# Altium PCB PCB1.PcbDoc
Units mil, origin at the board's own origin, x right, y up, seen from the top; angles counter-clockwise.
Board outline 3386.98 x 2206.38 mil, 2 copper layers (Top Layer, Bottom Layer), stack 65.792 mil thick; 42 components, 37 nets, 185 pads, 375 vias.
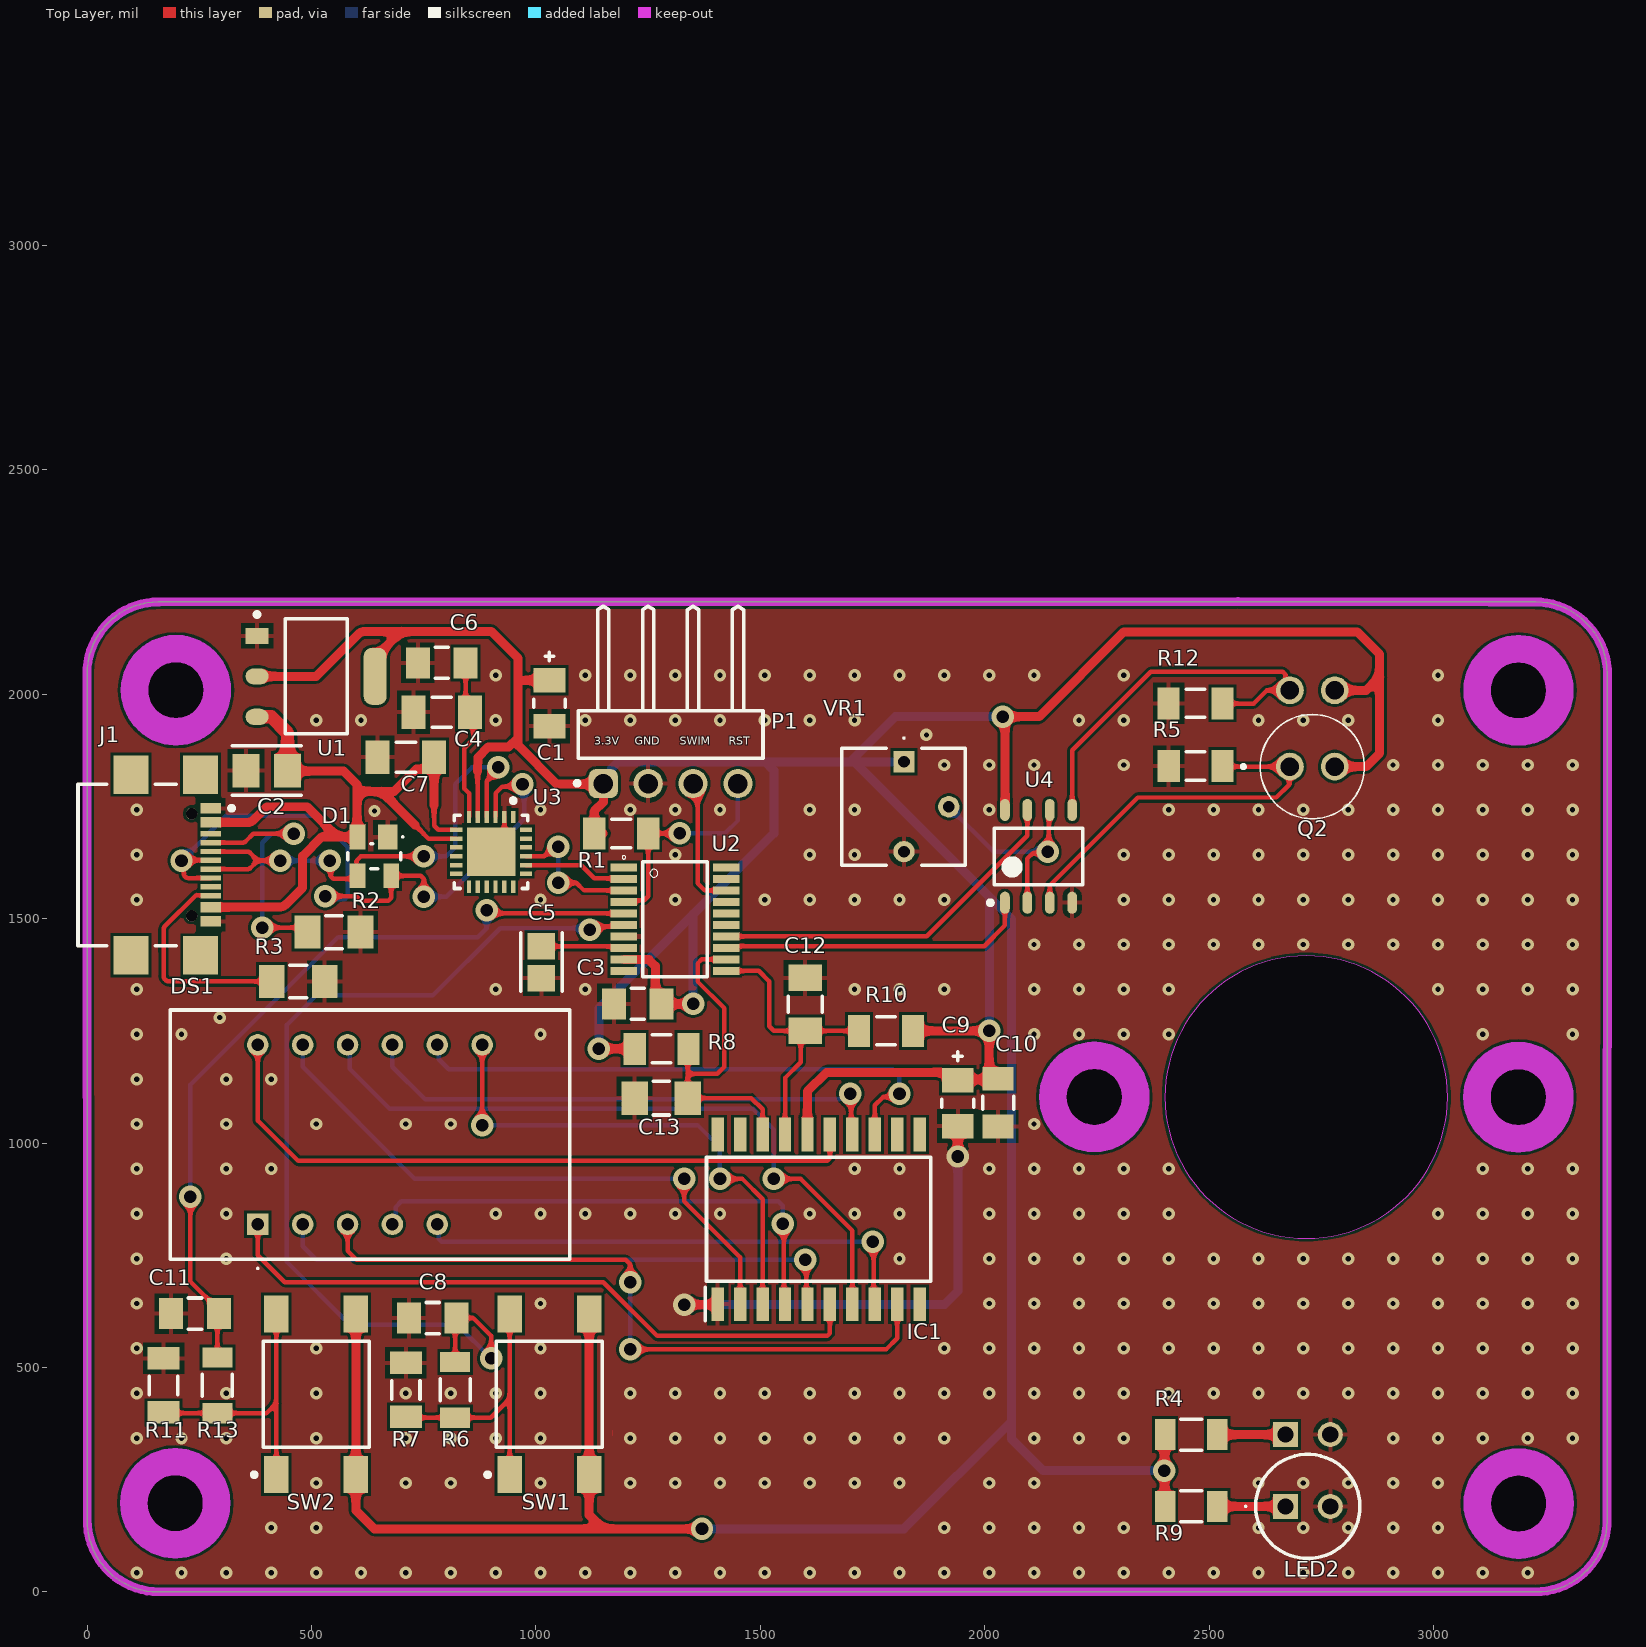
[diagram p0: Top Layer view]
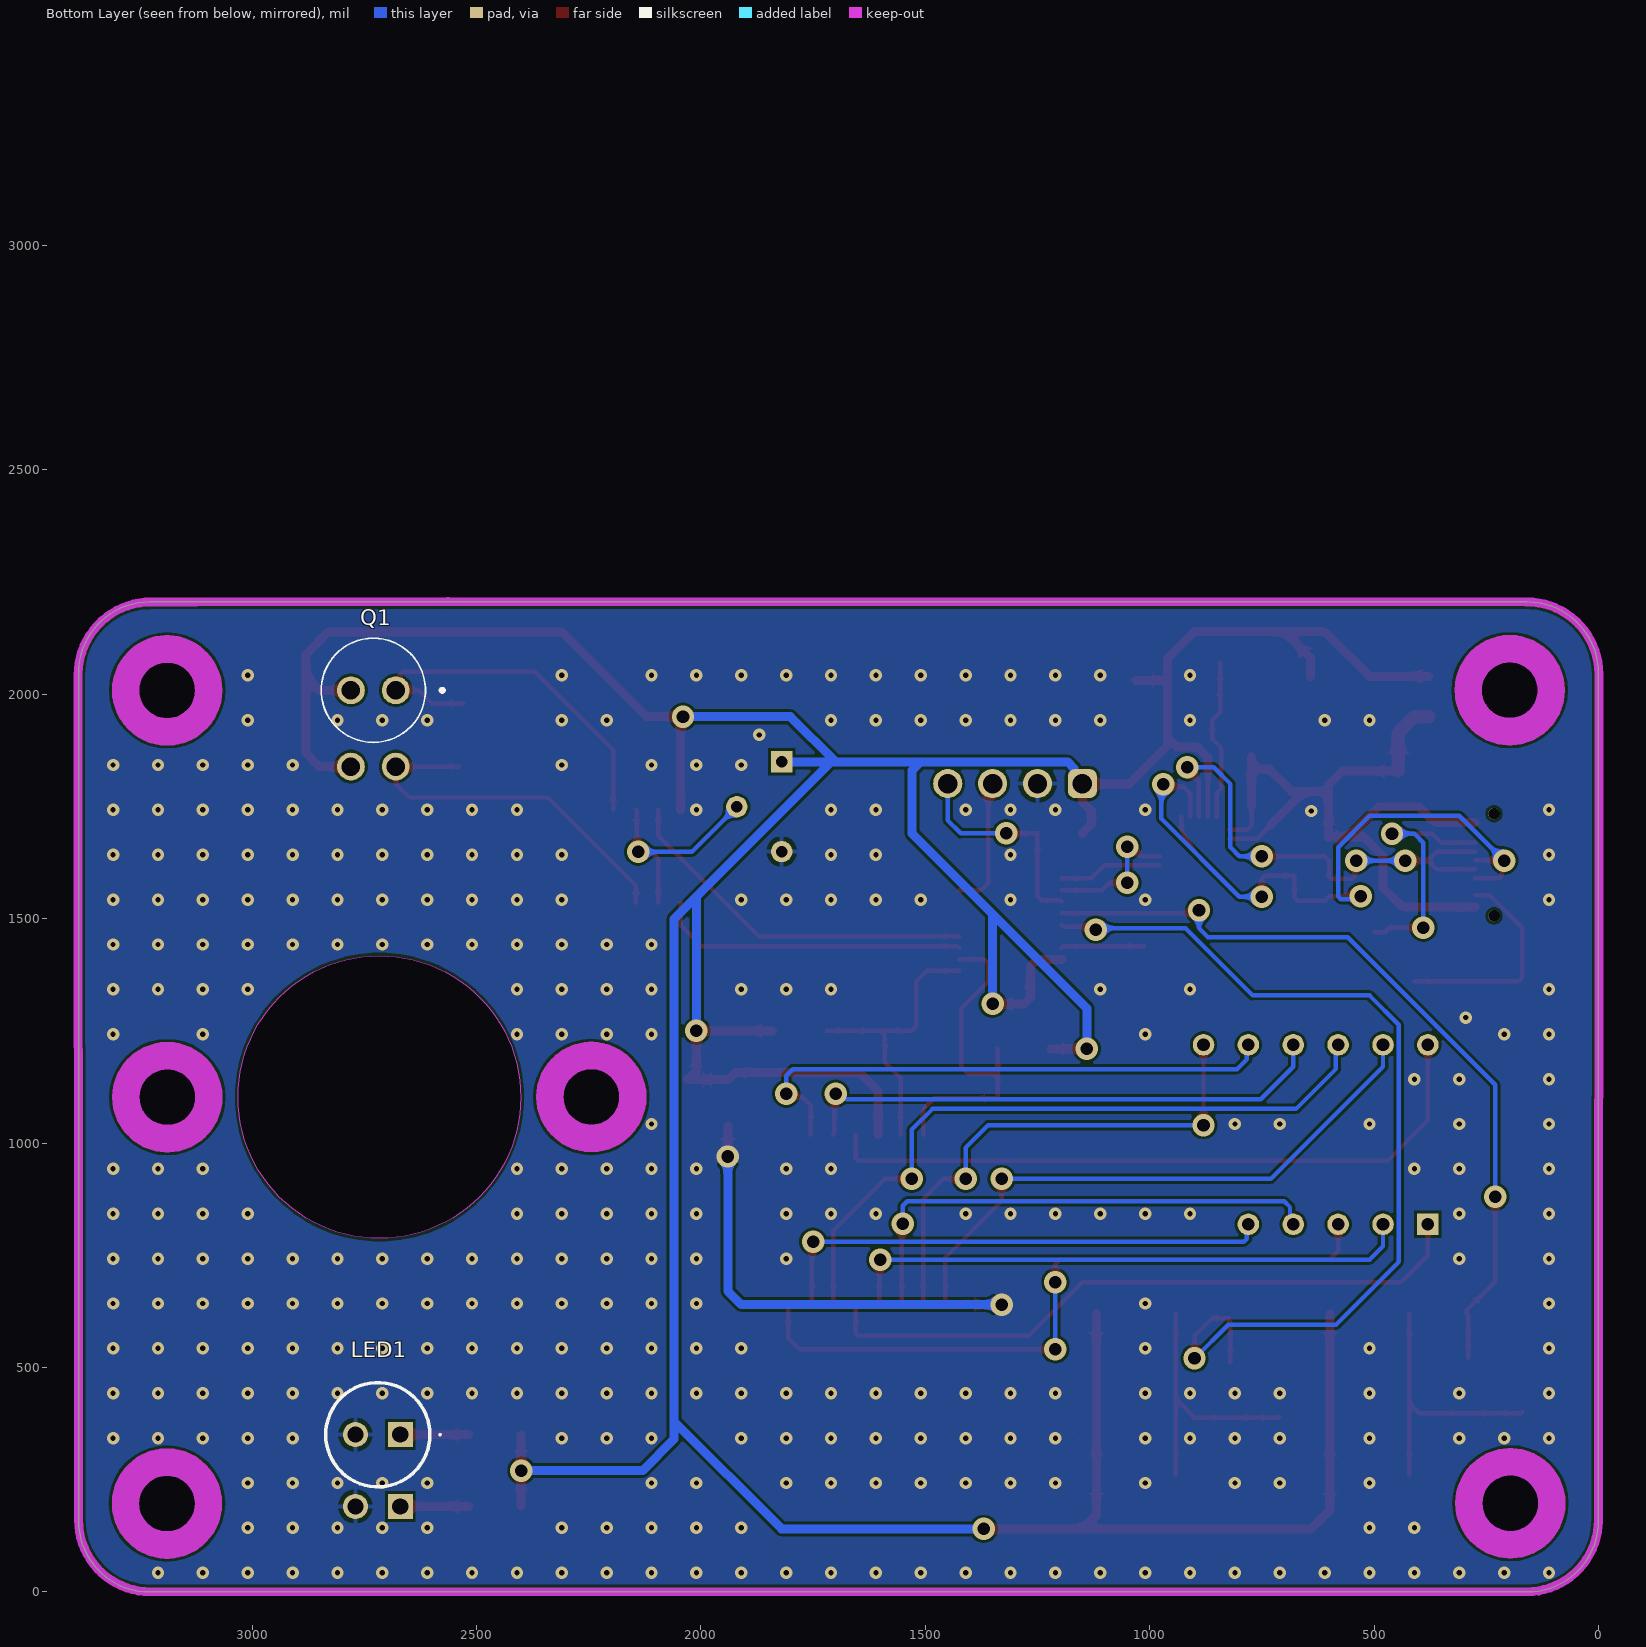
[diagram p1: Bottom Layer view, seen from below]
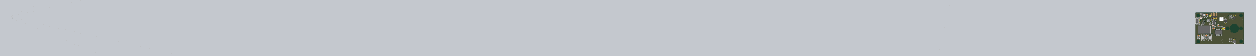
[diagram p2: 3D render of the assembled board from above, using the file's embedded part models]

## Layer stack, top to bottom
Top Solder: solder mask 0.4, Solder Resist, Dk 3.5
Top Layer: signal copper 1.4
Dielectric 1: dielectric 62.9921, FR-4, Dk 4.8
Bottom Layer: signal copper 1.4
Bottom Solder: solder mask 0.4, Solder Resist, Dk 3.5

## Board outline
3228.35,2205.87 158.63,2205.87 ccw(c158.63,2047.24) 0,2047.24 0,157.48 ccw(c157.98,157.48) 157.98,-0.5 3228.35,-0.5 ccw(c3228.67,157.8) 3386.97,157.48 3386.98,2047.24 ccw(c3228.35,2047.25)
cut-out: 2181.1,1102.69 ccw(c2244.09,1102.69) 2244.09,1039.7 ccw(c2244.09,1102.69) 2307.08,1102.69 ccw(c2244.09,1102.69) 2244.09,1165.68 ccw(c2244.09,1102.69)
cut-out: 3126.02,1102.14 ccw(c3189.01,1102.14) 3189.01,1039.15 ccw(c3189.01,1102.14) 3252,1102.14 ccw(c3189.01,1102.14) 3189.01,1165.13 ccw(c3189.01,1102.14)
cut-out: 2401.57,1102.36 ccw(c2716.54,1102.36) 2716.54,787.4 ccw(c2716.54,1102.36) 3031.5,1102.36 ccw(c2716.54,1102.36) 2716.54,1417.32 ccw(c2716.54,1102.36)
cut-out: 3126.8,196.56 ccw(c3189.79,196.56) 3189.79,133.57 ccw(c3189.79,196.56) 3252.78,196.56 ccw(c3189.79,196.56) 3189.79,259.55 ccw(c3189.79,196.56)
cut-out: 134.51,2009.13 ccw(c197.5,2009.13) 197.5,1946.14 ccw(c197.5,2009.13) 260.49,2009.13 ccw(c197.5,2009.13) 197.5,2072.12 ccw(c197.5,2009.13)
cut-out: 133.07,197.25 ccw(c196.06,197.25) 196.06,134.26 ccw(c196.06,197.25) 259.05,197.25 ccw(c196.06,197.25) 196.06,260.25 ccw(c196.06,197.25)
cut-out: 3126.4,2008.62 ccw(c3189.4,2008.62) 3189.4,1945.63 ccw(c3189.4,2008.62) 3252.39,2008.62 ccw(c3189.4,2008.62) 3189.4,2071.61 ccw(c3189.4,2008.62)

## Design rules (kind name [scope] priority, off if disabled: settings)
Clearance "Stitching GND" [IsStitchingVia and InNet('GND') vs (IsVia and (Not IsStitchingVia)) Or IsPad] p1: gap=5 ignorepadtopadclearanceinfootprint=FALSE
Clearance [All] p2: gap=6 ignorepadtopadclearanceinfootprint=FALSE except(10: Arc-Text Track-Text SMDPad-Text THPad-Text Via-Text Fill-Text Poly-Text Region-Text Text-Text)
MinimumSolderMaskSliver [All] p1: minsoldermaskwidth=6
PolygonConnect PolygonConnect_1 [InNet('GND')] p1: thpad.connectstyle=Relief thpad.reliefconductorwidth=10 thpad.reliefentries=4 thpad.polygonreliefangle="90 Angle" thpad.airgapwidth=10 smdpad.connectstyle=Relief smdpad.reliefconductorwidth=10 smdpad.reliefentries=4 smdpad.polygonreliefangle="90 Angle" smdpad.airgapwidth=10 via.connectstyle=Direct via.reliefconductorwidth=10 via.reliefentries=4 via.polygonreliefangle="90 Angle" via.airgapwidth=10
PolygonConnect [All] p2: connectstyle=Relief reliefconductorwidth=10 reliefentries=4 polygonreliefangle="90 Angle" airgapwidth=10
RoutingVias [All] p1: holewidth=28 width=50 viastyle="Through Hole" minholewidth=28 minwidth=50 maxholewidth=28 maxwidth=50
SilkToSolderMaskClearance [IsPad] p1: minsilkscreentomaskgap=4 clearancetoexposedcopper=TRUE
SolderMaskExpansion [All] p1: expansion=4 istentingtop=FALSE
SupplyNets "Schematic Supply Nets_2" [InNet('+5V')] p1: voltage=0.000
SupplyNets "Schematic Supply Nets_1" [InNet('+3.3V')] p2: voltage=0.000
SupplyNets "Schematic Supply Nets" [InNet('GND')] p3: voltage=0.000
Width Width_2 [InNet('+3.3V')] p1: maxlimit=30 minlimit=10 preferedwidth=20 minimp=50.000000 maximp=50.000000 favimp=50.000000
Width Width_1 [InNet('+5V')] p2: maxlimit=30 minlimit=10 preferedwidth=20 minimp=50.000000 maximp=50.000000 favimp=50.000000
Width [All] p3: maxlimit=39.37 minlimit=6 preferedwidth=10 minimp=50.000000 maximp=50.000000 favimp=50.000000
28 further rules are at their usual default settings.

## Components (designator, comment, footprint, x,y, rotation, side; value= is the part's Value field where it differs from the comment)
C1 "TAJA226M010RNJ" FP-TAJA-MFG 1030,1980 r90 top value=22µF
C2 "GCJ31CD7YA106KE02L" FP-GCJ31C-0_4-IPC_C 400,1830 r180 top value=10µF
C3 "UMK316B7104KLHT" FP-1206-L_3_2_0_15-W_1_6-IPC_B 1226.8,1310 r180 top value=100nF
C4 "1206ZC105JAT2A" CAPC1206(3216)130_M 790,1960 r180 top value=1µF
C5 "CC0805KKX7R6BB684" FP-CC0805-0_85-IPC_A 1012,1403 r270 top value=680nF
C6 "UMK316B7104KLHT" FP-1206-L_3_2_0_15-W_1_6-IPC_B 790,2070 r0 top value=100nF
C7 "1206ZC105JAT2A" CAPC1206(3216)130_M 710,1860 r0 top value=1µF
C8 "UMK316B7104KLHT" FP-1206-L_3_2_0_15-W_1_6-IPC_B 770,610 r180 top value=100nF
C9 "TLJA107M006R0500" FP-TLJA-MFG 1940,1088.82 r90 top value=100µF
C10 "UMK316B7104KLHT" FP-1206-L_3_2_0_15-W_1_6-IPC_B 2030,1090 r270 top value=100nF
C11 "UMK316B7104KLHT" FP-1206-L_3_2_0_15-W_1_6-IPC_B 240,620 r180 top value=100nF
C12 "12063A101KAT2A" FP-1206-L_3_2_0_2-W_1_6_0-IPC_A 1600,1309.09 r90 top value=100pF
C13 "12063A101KAT2A" FP-1206-L_3_2_0_2-W_1_6_0-IPC_A 1279.09,1100 r180 top value=100pF
D1 "SP0503BAHTG" LFUS-SOT143-4_V 640,1638.87 r270 top
DS1 "7 Segment Indicator" ELT315USOWAS530A3 380,818.87 r0 top
IC1 "TM1637" SOIC127P1045X280-20N 1630,830 r90 top
J1 "USB4110-GF-A" FP-USB4110-GF-A-MFG 130,1620 r270 top
LED1 "IR333" IR333H0A 2670,350.13 r0 bottom
LED2 "IR333" IR333H0A 2670,190.13 r0 top
P1 "ST-Link V2" 61300411021 1300,1910 r180 top
Q1 "PT333-3C" PT3333C 2730,2008.87 r0 bottom
Q2 "PT333-3C" PT3333C 2730,1838.87 r0 top
R1 "AC1206FR-1310KL" FP-AC1206-IPC_A 1190,1690 r0 top value=10k
R2 "ESR18EZPF5101" FP-ESR18-IPC_A 550,1470 r0 top value=5.1k
R3 "ESR18EZPF5101" FP-ESR18-IPC_A 470,1360 r0 top value=5.1k
R4 "RC3216J101CS" FP-RC3216-IPC_B 2460,350.13 r0 top value=100
R5 "AC1206FR-1310KL" FP-AC1206-IPC_A 2469.88,1980 r0 top value=10k
R6 "RP73D2B1K0BTG" FP-RP732B-MFG 820,450 r90 top value=1k
R7 "AC1206FR-1310KL" FP-AC1206-IPC_A 710,450 r90 top value=10k
R8 "AC1206FR-1310KL" FP-AC1206-IPC_A 1280,1210 r0 top value=10k
R9 "RC3216J101CS" FP-RC3216-IPC_B 2460,190.13 r0 top value=100
R10 "AC1206FR-1310KL" FP-AC1206-IPC_A 1780,1250 r0 top value=10k
R11 "RP73D2B1K0BTG" FP-RP732B-MFG 290,460 r90 top value=1k
R12 "AC1206FR-1310KL" FP-AC1206-IPC_A 2470,1840 r0 top value=10k
R13 "AC1206FR-1310KL" FP-AC1206-IPC_A 170,460 r90 top value=10k
SW1 "FSM4JSMATR" TECO-FSM4JSMATR_V 1030,440 r180 top
SW2 "FSM4JSMATR" TECO-FSM4JSMATR_V 510,440 r180 top
U1 "AMS1117-3.3" FP-AMS1117-IPC_B 510,2040 r0 top
U2 "STM8S103F3P6" SOP65P640X120-20N 1310,1498.87 r0 top
U3 "CP2104-F03-GM" FP-CP2104-F03-GM-MFG 900,1648.87 r270 top
U4 "LM393DT" STM-SO-8_D_L 2120,1638.87 r90 top
VR1 "3362P-1-205LF" 3362P1205LF 1820,1849.37 r270 top

## Footprints (in the part's own frame and the unit in brackets; to place one, negate y for a bottom-side part, rotate by r counter-clockwise, add the part's x,y. Pads: shape width x height; smd on the part's side, far side on the other; paste and mask are expansions set on the pad)
3362P1205LF [mm]
  rect 1.21x1.21 hole 0.66: 1(0,0)
  round 1.21 hole 0.66: 2(2.54,2.54) 3(5.08,0)
  silkscreen extent -1.4,-3.53 5.84,3.46, body extent -0.75,-3.54 5.85,3.45, height 4.65
61300411021 [mm] "Pin Header, pitch 2.54 mm, THT, Angled, single row, 4p"
  rrect50% 1.65x1.65 hole 1.1: 1(3.81,2.77)
  round 1.65 hole 1.1: 2(1.27,2.77) 3(-1.27,2.77) 4(-3.81,2.77)
  silkscreen extent -5.23,-7.27 5.41,2.87, body extent -5.08,-7.27 5.08,3.09, height 2.58
CAPC1206(3216)130_M [mm] "Chip Capacitor, Body 3.2x1.6mm, Height 1.3mm, IPC Low Density"
  rect 1.35x1.9 smd: 1(-1.6,0) 2(1.6,0)
  silkscreen extent -0.55,-0.85 0.55,0.85, body extent -1.7,-0.9 1.7,0.9, height 1.3
ELT315USOWAS530A3 [mm]
  rect 1.217x1.217 hole 0.71: 1(0,0)
  round 1.217 hole 0.71: 2(2.54,0) 3(5.08,0) 4(7.62,0) 5(10.16,0) 7(12.7,10.16) 8(10.16,10.16) 9(7.62,10.16) 10(5.08,10.16) 11(2.54,10.16) 12(0,10.16)
  silkscreen extent -4.95,-2.55 17.65,12.13, body extent -4.95,-1.97 17.65,12.13, height 7.55
FP-1206-L_3_2_0_2-W_1_6_0-IPC_A [mil]
  rect 59.24x75.05 smd paste+0 mask+0: 1(-59.09,0) 2(59.09,0)
  silkscreen extent -18,-38 18,38, body extent -63,-31 63,31, height 37
FP-1206-L_3_2_0_15-W_1_6-IPC_B [mil]
  rect 53.37x69.22 smd paste+0 mask+0: 1(-53.2,0) 2(53.2,0)
  silkscreen extent -15,-35 15,35, body extent -63,-31 63,31, height 71
FP-AC1206-IPC_A [mil]
  rect 49.53x71.34 smd paste+0 mask+0: 1(-60.12,0) 2(60.12,0)
  silkscreen extent -21,-31 21,31, body extent -61,-31 61,31, height 26
FP-AMS1117-IPC_B [mm]
  rect 1.304x0.912 smd paste+0 mask+0: 1(-3.345,2.29)
  rrect100% 1.304x0.912 smd paste+0 mask+0: 2(-3.345,0) 3(-3.345,-2.29)
  rrect70% 1.304x3.222 smd paste+0 mask+0: 4(3.345,0)
  silkscreen extent -3.47,-3.25 1.75,3.62, body extent -4.25,-3.5 4.25,3.5, height 0.25
FP-CC0805-0_85-IPC_A [mil]
  rect 59.24x61.27 smd paste+0 mask+0: 1(-35.46,0) 2(35.46,0)
  silkscreen extent -65,-46 65,46, body extent -85,-50 85,50, height 10
FP-CP2104-F03-GM-MFG [mm]
  rect 0.7x0.25 smd paste+0 mask+0: 1(-1.975,1.25) 2(-1.975,0.75) 3(-1.975,0.25) 4(-1.975,-0.25) 5(-1.975,-0.75) 6(-1.975,-1.25) 13(1.975,-1.25) 14(1.975,-0.75) 15(1.975,-0.25) 16(1.975,0.25) 17(1.975,0.75) 18(1.975,1.25)
  rect 0.25x0.7 smd paste+0 mask+0: 7(-1.25,-1.975) 8(-0.75,-1.975) 9(-0.25,-1.975) 10(0.25,-1.975) 11(0.75,-1.975) 12(1.25,-1.975) 19(1.25,1.975) 20(0.75,1.975) 21(0.25,1.975) 22(-0.25,1.975) 23(-0.75,1.975) 24(-1.25,1.975)
  rect 2.75x2.75 smd paste-1000 mask+0: 25(0,0)
  silkscreen extent -3.02,-2.07 2.08,2.07, body extent -2.42,-2.42 2.43,2.42, height 0.25
FP-ESR18-IPC_A [mil]
  rect 57.31x73.16 smd paste+0 mask+0: 1(-59.1,0) 2(59.1,0)
  silkscreen extent -19,-37 19,37, body extent -63,-31 63,31, height 26
FP-GCJ31C-0_4-IPC_C [mil]
  rect 61.12x74.93 smd paste+0 mask+0: 1(-46.27,0) 2(46.27,0)
  silkscreen extent -77,-55 77,55, body extent -63,-31 63,31, height 79
FP-RC3216-IPC_B [mil]
  rect 45.47x69.22 smd paste+0 mask+0: 1(-58.1,0) 2(58.1,0)
  silkscreen extent -24,-35 24,35, body extent -91,-44 91,44, height 10
FP-RP732B-MFG [mm]
  rect 1.15x1.7 smd paste+0 mask+0: 1(-1.575,0) 2(1.575,0)
  silkscreen extent -0.63,-0.85 0.63,0.85, body extent -1.53,-0.77 1.53,0.77, height 0.65
FP-TAJA-MFG [mm]
  rect 1.4x1.8 smd paste+0 mask+0: 1(-1.3,0) 2(1.3,0)
  silkscreen extent -0.23,-0.9 2.9,0.9, body extent -2.1,-1 2.1,1, height 0.25
FP-TLJA-MFG [mm]
  rect 1.4x1.8 smd paste+0 mask+0: 1(-1.3,0) 2(1.3,0)
  silkscreen extent -0.23,-0.9 2.9,0.9, body extent -2.1,-1 2.1,1, height 0.25
FP-USB4110-GF-A-MFG [mm]
  rect 2.18x2 smd paste+0 mask+0: 1(-5.11,3.105) 2(5.11,3.105) 3(-5.11,-0.825) 4(5.11,-0.825)
  rect 0.6x1.15 smd paste+0 mask+0: A1-B12(-3.2,3.68) A4-B9(-2.4,3.68) B1-A12(3.2,3.68) B4-A9(2.4,3.68)
  rect 0.3x1.15 smd paste+0 mask+0: A5(-1.25,3.68) A6(-0.25,3.68) A7(0.25,3.68) A8(1.25,3.68) B5(1.75,3.68) B6(0.75,3.68) B7(-0.75,3.68) B8(-1.75,3.68)
  round 0.65 hole 0.65 unplated paste-2539.97 mask+0: ""(-2.89,2.605) ""(2.89,2.605)
  silkscreen extent -4.57,-3.83 4.57,4.99, body extent -6.3,-3.92 6.3,4.36, height 0.25
IR333H0A [mm]
  rect 1.416x1.416 hole 0.91: 1(0,0)
  round 1.416 hole 0.91: 2(2.54,0)
  silkscreen extent -2.3,-2.95 4.22,2.95, body extent -1.68,-2.95 4.22,2.95, height 10.5
LFUS-SOT143-4_V [mm] "SOT143, 4-Leads, Body 3.04x1.4mm, Pitch 1.90mm"
  rect 1.4x1.1 smd: 1(-1.1,0.75)
  rect 1.4x0.9 smd: 2(-1.1,-0.95) 3(1.1,-0.95) 4(1.1,0.95)
  silkscreen extent -1.15,-1.5 0.7,1.65, body extent -0.7,-1.52 0.7,1.52, height 1.22
PT3333C [mm]
  round 1.575 hole 1.05: 1(-1.27,0) 2(1.27,0)
  silkscreen extent -4,-2.95 2.95,2.95, body extent -2.41,-3.08 3.04,2.82, height 15.22
SOIC127P1045X280-20N [mm]
  rect 1.9x0.7 smd: 1(-4.8,5.715) 2(-4.8,4.445) 3(-4.8,3.175) 4(-4.8,1.905) 5(-4.8,0.635) 6(-4.8,-0.635) 7(-4.8,-1.905) 8(-4.8,-3.175) 9(-4.8,-4.445) 10(-4.8,-5.715) 11(4.8,-5.715) 12(4.8,-4.445) 13(4.8,-3.175) 14(4.8,-1.905) 15(4.8,-0.635) 16(4.8,0.635) 17(4.8,1.905) 18(4.8,3.175) 19(4.8,4.445) 20(4.8,5.715)
  silkscreen extent -5.75,-6.35 3.5,6.42, body extent -5.23,-6.35 5.23,6.35, height 2.8
SOP65P640X120-20N [mm]
  rect 1.5x0.45 smd: 1(-2.9,2.925) 2(-2.9,2.275) 3(-2.9,1.625) 4(-2.9,0.975) 5(-2.9,0.325) 6(-2.9,-0.325) 7(-2.9,-0.975) 8(-2.9,-1.625) 9(-2.9,-2.275) 10(-2.9,-2.925) 11(2.9,-2.925) 12(2.9,-2.275) 13(2.9,-1.625) 14(2.9,-0.975) 15(2.9,-0.325) 16(2.9,0.325) 17(2.9,0.975) 18(2.9,1.625) 19(2.9,2.275) 20(2.9,2.925)
  silkscreen extent -3,-3.25 1.83,3.6, body extent -3.2,-3.25 3.2,3.25, height 1.19
STM-SO-8_D_L [mm] "SOIC, 8-Leads, Body 5x4mm, Pitch 1.27mm, IPC High Density"
  oval 1.25x0.55 smd: 1(-2.625,1.905) 2(-2.625,0.635) 3(-2.625,-0.635) 4(-2.625,-1.905) 5(2.625,-1.905) 6(2.625,-0.635) 7(2.625,0.635) 8(2.625,1.905)
  silkscreen extent -2.75,-2.5 1.6,2.85, body extent -3,-2.5 3,2.5, height 1.75
TECO-FSM4JSMATR_V [mm] "SMD, 4-Leads, Body 6x6mm, Pitch 4.5mm"
  rect 1.4x2.1 smd: 1(2.25,4.55) 2(2.25,-4.55) 3(-2.25,4.55) 4(-2.25,-4.55)
  silkscreen extent -3,-3 3.62,4.67, body extent -3,-5 3,5, height 5.08

## Part data
C1: library part CMP-001-00089-1, "Cap Tant Solid 22uF 10V A CASE 20%( 3.2 X 1.6 X 1.6mm) Inward L SMD 3216-18 3 Ohm 125C T/R", Max Operating Temperature=125°C, Min Operating Temperature=-55°C, Package=1206, Ripple Current=63mA, Tolerance=20%, Voltage=10V, Mounting Technology="Surface Mount", Pins=2
C2: library part CMP-001-00085-1, "Ceramic Capacitor, Ceramic, 35V, 10% +Tol, 10% -Tol, X7T, 22/-33% TC, 10uF, Surface Mount, 1206", Max Operating Temperature=125°C, Min Operating Temperature=-55°C, Package=1206, Tolerance=10%, Voltage=35V, Mounting Technology="Surface Mount"
C3 C6 C8 C10 C11: library part CMP-001-00093-1, "Ceramic Capacitor, Multilayer, Ceramic, 50V, 10% +Tol, 10% -Tol, X7R, 15% TC, 0.1uF, Surface Mount, 1206", Capacitor Type=Ceramic, Max Operating Temperature=125°C, Min Operating Temperature=-55°C, Package=1206, Mounting Technology="Surface Mount", Pins=2, RoHS Compliant=Yes
C4 C7: library part CMP-001-00084-1, "Ceramic Capacitor, Multilayer, Ceramic, 10V, 5% +Tol, 5% -Tol, X7R, 15% TC, 1uF, Surface Mount, 1206", Max Operating Temperature=125°C, Min Operating Temperature=-55°C, Package=1206, Tolerance=5%, Voltage=10V, Mounting Technology="Surface Mount", Pins=2
C5: library part CMP-001-00094-1, "Ceramic Capacitor, Multilayer, Ceramic, 10V, 10% +Tol, 10% -Tol, X7R, 15% TC, 0.68uF, Surface Mount, 0805", Capacitor Type=Ceramic, Max Operating Temperature=125°C, Min Operating Temperature=-55°C, Package=0805, Mounting Technology="Surface Mount", Pins=2, RoHS Compliant=Yes
C9: library part CMP-001-00091-1, "Cap Tant Solid 100uF 6.3V A CASE 20% (3.2 X 1.6 X 1.6mm) Inward L SMD 3216-18 0.5 Ohm 125C T/R", Max Operating Temperature=125°C, Min Operating Temperature=-55°C, Package=1206, Ripple Current=155mA, Tolerance=20%, Voltage=6.3V, Mounting Technology="Surface Mount", Pins=2
C12 C13: library part CMP-001-00096-1, "Ceramic Capacitor, Multilayer, Ceramic, 25V, 10% +Tol, 10% -Tol, C0G, 30ppm/Cel TC, 0.0001uF, Surface Mount, 1206", Capacitor Type=Ceramic, Max Operating Temperature=125°C, Min Operating Temperature=-55°C, Package=1206, Mounting Technology="Surface Mount", Pins=2, RoHS Compliant=Yes
D1: library part CMP-004-00031-1, "SP050xBA Series 8.5 V 30 pF Triple Uni-Directional TVS Avalanche Diode-SOT143-4", Max Operating Temperature=125°C, Min Operating Temperature=-40°C, Package=SOT-143, Mounting Technology="Surface Mount", Pins=4
DS1: library part ELT-315USOWA_S530-A3, "Display", Manufacturer=Everlight, Part Number=ELT-315USOWA/S530-A3, Datasheet Link=https://media.digikey.com/pdf/Data%20Sheets/Everlight%20PDFs/ELT-315USOWA_S530-A3.pdf, Height=7.45mm
IC1: library part TM1637__SOP_, "Integrated Circuit", Manufacturer="TITAN MICRO ELECTRONICS", Part Number="TM1637 (SOP)", Datasheet Link=https://www.mcielectronics.cl/website_MCI/static/documents/Datasheet_TM1637.pdf, Height=2.8mm
J1: library part CMP-002-00071-1, "USB Connector, 16 Contact(s), Male, Right Angle, Surface Mount Terminal, Locking, Receptacle", Max Operating Temperature=85°C, Min Operating Temperature=-40°C, Voltage=20V, Gender=Receptacle, Pins=16
LED1 LED2: library part IR333_H0-A, "LED", Manufacturer=Everlight, Mouser Part Number=638-IR333/H0-A, Part Number=IR333/H0-A, Datasheet Link=https://datasheet.lcsc.com/lcsc/1808280419_Everlight-Elec-IR333-H0-A_C264292.pdf, Height=10.4mm, Mouser Price/Stock=https://www.mouser.co.uk/ProductDetail/Everlight/IR333-H0-A?qs=By6Nw2ByBD39%252BlkBkN%2FobQ%3D%3D
P1: library part CMP-007-000000-1, Color=Black, Contact Resistance=20m?, Current Rating=3A, Operating Supply Voltage=250V, Component Type=Standard, Connector Type="Male Pin", Contact Material=Copper, Contact Mating Length=5.9944mm, Contact Plating=Gold, Design Item ID=CMP-1502-01063-3, Gender=Male, Lead Pitch=2.54mm, Mount="Through Hole", NexarPartId=31153320, Number of Contacts=4, Number of Pins=4, Number of Positions=4, Number of Rows=1, Pin Count=4, Pitch=2.54mm, REACH SVHC=Unknown, RoHS=Compliant, Source="Components - 25.08.25 - 11.48.SchLib", Termination=Solder
Q1 Q2: "Phototransistor", Manufacturer=Everlight, Mouser Part Number=638-PT3333C, Arrow Part Number=PT333-3C, Arrow Price/Stock=https://www.arrow.com/en/products/pt333-3c/everlight-electronics?region=nac, Datasheet Link=https://datasheet.datasheetarchive.com/originals/distributors/Datasheets-3/DSA-51362.pdf, Mouser Price/Stock=https://www.mouser.com/Search/Refine.aspx?Keyword=638-PT3333C, Part Number=PT333-3C
R1 R5 R7 R8 R10 R12 R13: library part CMP-009-00188-1, "Res Thick Film 1206 10K Ohm 1% 0.25W(1/4W) ±100ppm/°C Pad SMD T/R Automotive AEC-Q200", Max Operating Temperature=155°C, Min Operating Temperature=-55°C, Package=1206, Tolerance=1%, Voltage=200V, Mounting Technology="Surface Mount"
R2 R3: library part CMP-009-00187-1, "Res Thick Film 1206 5.1K Ohm 1% 0.5W(1/2W) ±100ppm/C Pad SMD T/R Automotive AEC-Q200", Max Operating Temperature=155°C, Min Operating Temperature=-55°C, Package=1206, Tolerance=1%, Voltage=200V, Mounting Technology="Surface Mount"
R4 R9: library part CMP-009-00193-1, "Res Thick Film 1206 100 Ohm 5% 1/4W ±100ppm/°C Molded SMD T/R", Max Operating Temperature=155°C, Min Operating Temperature=-55°C, Package=1206, Tolerance=5%, Voltage=200V, Mounting Technology="Surface Mount"
R6 R11: library part CMP-009-00192-1, "Res Thin Film 1206 1K Ohm 0.1% 0.25W(1/4W) ±15ppm/C Pad SMD Cut Tape Medical", Max Operating Temperature=155°C, Min Operating Temperature=-55°C, Package=1206, Tolerance=0.1%, Voltage=25V, Mounting Technology="Surface Mount", Pins=2
SW1 SW2: library part CMP-016-00017-1, "Keypad Switch, 1 Switches, SPST, Momentary-tactile, 0.05A, 24VDC, 2.06N, Solder Terminal, Surface Mount-straight", Max Operating Temperature=85°C, Min Operating Temperature=-20°C, Mounting Technology="Surface Mount", RoHS Compliant=Yes
U1: library part CMP-019-00049-1, "Fixed Positive LDO Regulator, 3.3V, 1.3V Dropout, PDSO3", Package=SOP, Pins=3, RoHS Compliant=Yes
U2: library part CMP-031-00007-3, "STM8 series Microcontroller IC 8-Bit 16MHz 8KB (8K x 8) FLASH 20-TSSOP", Package="TSSOP-20 STMicroelectronics", Check_prices=https://www.snapeda.com/parts/STM8S103F3P6/STMicroelectronics/view-part/?ref=eda, Component Type=Standard, Design Item ID=STM8S103F3P6, MF=STMicroelectronics, MP=STM8S103F3P6, Pins=20, SnapEDA_Link=https://www.snapeda.com/parts/STM8S103F3P6/STMicroelectronics/view-part/?ref=snap, Source=STM8S103F3P6.SchLib
U3: library part CMP-015-00008-1, "USB-to-UART 1-CH 576byte FIFO 3.3V Automotive 24-Pin QFN EP Tube", Max Operating Temperature=85°C, Max Supply Voltage=3.6V, Min Operating Temperature=-40°C, Min Supply Voltage=3V, Package=QFN, Pins=24
U4: library part CMP-016-00016-1, "Comparator, 2 Func, 9000uV Offset-Max, 1300ns Response Time, BIPolar, PDSO8", Max Operating Temperature=70°C, Min Operating Temperature=0°C, Nominal Supply Voltage=5V, Package=SOP, Pins=8, RoHS Compliant=Yes
VR1: "Variable Resistor", Manufacturer=Bourns, Mouser Part Number=652-3362P-1-205LF, Arrow Part Number=3362P-1-205LF, Arrow Price/Stock=https://www.arrow.com/en/products/3362p-1-205lf/bourns?region=nac, Datasheet Link=https://www.bourns.com/docs/Product-Datasheets/3362.pdf, Height=5.13mm, Mouser Price/Stock=https://www.mouser.co.uk/ProductDetail/Bourns/3362P-1-205LF?qs=nRMFw3K2t64w844%2Fcd92TA%3D%3D, Part Number=3362P-1-205LF

## Via types
v1: diameter 27.56, hole 11.81, Top Layer to Bottom Layer, tented both sides, 338 vias
v2: diameter 50, hole 28, Top Layer to Bottom Layer, tented both sides, 37 vias

## Nets (pads, with @x,y where several pads share a name; then routed paths per layer and width w, separated by ;. In a path a pad name is that pad's centre, name@x,y a point inside that pad or via, vN(x,y) a via of type N, cw(c..) or ccw(c..) an arc to the next point about the centre after c; other vN are vias at no path point)
+3.3V: C1.2 C3.1 C9.2 C10.1 IC1.16 P1.1 Q1.2 Q2.2 R1.1 R4.1 R8.1 R9.1 R10.2 SW1.3 SW1.4 SW2.3 SW2.4 U1.2 U1.4 U2.9 U3.5 U4.8 VR1.1 | length 11457.9
  Top Layer w10: 870,1829.37 U3.5
  Top Layer w20: U1.2 510,2040 606,2136 606.28,2136 cw(c618.28,2120) 618.28,2140 700,2140 ; SW2.4 SW2.3 598.58,181.42 640,140 1150,140 ; U1.4 641.69,2081.69 700,2140 ; 870,1829.37 870.47,1858.9 894.15,1882.57 939.2,1882.57 960,1903.37 ; C1.2 961.18,2031.18 960,2030 ; SW1.4 SW1.3 1118.58,171.42 1150,140 ; v2(1140,1210) R8.1 ; R1.1@1149.88,1690 1130,1709.88 1130,1740 1149.94,1759.94 P1.1@1149.94,1800 ; P1.1@1150,1800 P1.1@1149.94,1800 ; P1.1 1149.94,1800.89 P1.1@1149.94,1800 ; U2.9@1196.56,1408.57 1251.43,1408.57 1265.94,1394.06 1265.94,1324.06 C3.1 v2(1350,1310) ; v2(1370,140) 1150,140 ; IC1.16 1605,1115 1647.56,1157.56 1922.44,1157.56 C9.2 1941.6,1141.6 2028.4,1141.6 C10.1 2026.68,1143.2 2010,1159.89 v2(2010,1250) R10.2 ; U4.8 2045.32,1742.53 2045.32,1944.68 v2(2040,1950) 2121.13,1950 2310,2138.87 2830,2138.87 2880,2088.87 2880,2038.87 ; R9.1@2400.95,191.08 v2@2400.95,269.17 ; v2@2400.95,271.08 R4.1@2400.95,349.17 ; Q2.2 2850,1838.87 2880,1868.87 2880,2038.87 ; Q1.2 2850,2008.87 2880,2038.87 ; 700,2140 900,2140 960,2080 960,2030 ; 960,1903.37 960,2030 ; 960,1903.37 960,1886.19 1046.19,1800 P1.1@1149.94,1800
  Bottom Layer w20: v2(1140,1210) 1140,1300 1350,1510 ; P1.1 1168.63,1819.57 1168.63,1835.12 1182.94,1849.43 1470.08,1849.43 1470.14,1849.37 1510.63,1849.37 ; v2(1350,1310) 1350,1510 ; v2(1370,140) 1820,140 2060,380 ; VR1.1 1700,1849.37 ; v2(2010,1250) 2010.12,1250.12 2010.12,1548.75 ; v2(2040,1950) 1800.63,1950 1700,1849.37 ; v2(2400,270.13) 2129.87,270.13 2060,340 2060,380 ; 1350,1510 1530,1690 1530,1830 1510.63,1849.37 ; 1510.63,1849.37 1700,1849.37 ; 1700,1849.37 1709.5,1849.37 2010.12,1548.75 ; 2010.12,1548.75 2060,1498.87 2060,380
+5V: C2.1 C7.2 D1.2 J1.A4-B9 J1.B4-A9 U1.3 U3.7 U3.8 | length 1822.3
  Top Layer w10: 730,1708.87 760.47,1678.39 U3.8 ; 772.99,1752.99 772.99,1707.01 781.92,1698.08 U3.7
  Top Layer w20: J1.B4-A9 427.86,1525.51 ccw(c427.86,1545.51) 439.86,1529.51 ccw(c427.86,1545.51) 442,1531.37 480,1569.37 480,1639.37 522.8,1682.17 557.2,1682.17 ; J1.A4-B9 356.83,1714.49 ccw(c356.83,1734.49) 368.83,1718.49 ccw(c356.83,1734.49) 370.98,1720.35 400,1749.37 490,1749.37 557.2,1682.17 ; C2.1 447.4,1828.87 571.13,1828.87 601.3,1798.7 601.3,1783.87 ; D1.2@601.3,1683.47 601.3,1783.87 ; D1.2 557.2,1682.17 ; 730,1708.87 655,1783.87 ; 772.99,1752.99 C7.2@772.99,1849.87 ; C7.2 C7.2@772.99,1849.87 ; 601.3,1783.87 655,1783.87 ; 655,1783.87 683.87,1783.87 733.29,1833.29 756.42,1833.29 C7.2@772.99,1849.87
  Top Layer w30: U1.3 410.16,1949.84 446.27,1913.73 C2.1
Button1: C11.1 R11.2 U2.5 | length 1787.9
  Top Layer w10: v2(230,880) 230,691.13 293.2,627.93 C11.1 290,616.8 R11.2 ; v2(890,1518.87) 897.2,1511.66 U2.5
  Bottom Layer w10: v2@230,880.87 230,1130 558.87,1458.87 870,1458.87 890,1478.87 v2(890,1518.87)
Button2: C8.1 R6.2 U2.6 | length 2159.8
  Top Layer w10: R6.2 C8.1@820,602.07 ; C8.1@823.2,602.07 C8.1 860,610 900,570 v2(900,520) ; v2(1120,1475.66) 1126.55,1482.21 1191.97,1482.21 U2.6
  Bottom Layer w10: v2(900,520) 824.64,595.36 584.64,595.36 445.04,734.96 445.04,1263.91 510,1328.87 770,1328.87 920,1478.87 1116.8,1478.87 v2(1120,1475.66)
CC1: J1.A5 R2.1 | length 574.8
  Top Layer w10: J1.A5 345.7,1669.21 ccw(c345.7,1679.21) 351.7,1671.21 ccw(c345.7,1679.21) 352.75,1672.12 370,1689.37 v2(460,1689.37) ; v2(390,1480) 466.34,1480 476.34,1470 R2.1 R2.1@500,1470
  Bottom Layer w10: v2(390,1480) 390,1669.37 410,1689.37 v2(460,1689.37)
CC2: J1.B5 R3.1 | length 489.9
  Top Layer w10: 170,1372.89 ccw(c182.8,1372.92) 180.33,1360.37 181.36,1360.17 ccw(c183.2,1370) 183.2,1360 R3.1 ; 170,1372.93 169.96,1475.85 cw(c179.96,1475.81) 171.96,1481.81 cw(c179.96,1475.81) 172.89,1482.89 242.65,1552.65 J1.B5@274.88,1552.65
CLK: C13.1 IC1.18 R8.2 U2.12 | length 755.3
  Top Layer w10: R8.2 1338.17,1208.05 1338.17,1154.03 ; U2.12 1369.3,1409.3 1360,1400 1360,1360 1420,1300 1420,1170 1404.03,1154.03 1338.17,1154.03 ; IC1.18 1505,1075 1480,1100 C13.1 1338.17,1154.03
D+: D1.4 J1.A6 J1.B6 U3.3 | length 1581.3
  Top Layer w10: J1.B6 225.08,1590.47 cw(c225.08,1600.47) 215.08,1600.47 215.08,1624.29 v2(210,1629.37) 211.12,1630.49 J1.A6@274.88,1630.49 ; v2(530,1550) 599.85,1550 609.85,1540 671.13,1540 677.4,1546.27 D1.4 743.31,1595.56 750,1588.87 v2(750,1548.87) ; U3.3 909.92,1726.7 909.92,1779.29 925,1794.37 965,1794.37 v2(970,1799.37)
  Bottom Layer w10: v2(210,1629.37) 310,1729.37 510,1729.37 580,1659.37 580,1549.37 574.14,1543.51 536.49,1543.51 v2(530,1550) ; v2(750,1548.87) 800,1548.87 973.79,1722.65 973.79,1795.58 v2(970,1799.37)
D-: D1.3 J1.A7 J1.B7 U3.4 | length 1106.9
  Top Layer w10: J1.A7 356.65,1610.16 ccw(c356.65,1620.16) 362.65,1612.16 ccw(c356.65,1620.16) 363.69,1613.06 380,1629.37 ; J1.B7 355.7,1649.53 cw(c355.7,1639.53) 362.77,1646.6 380,1629.37 ; v2(430,1629.37) 380,1629.37 ; v2(540,1628.87) 542.43,1626.44 542.43,1594.72 548.28,1588.87 595.91,1588.87 D1.3 600,1598.16 600,1628.87 610,1638.87 v2(750,1638.87) ; U3.4 890.16,1806.64 916,1832.49 v2(916,1837.37)
  Bottom Layer w10: v2@450.25,1629.12 539.75,1629.12 v2(540,1628.87) ; v2(750,1638.87) 800,1638.87 820,1658.87 820,1800 857.37,1837.37 v2(916,1837.37)
DIO: C12.1 IC1.17 R10.1 U2.11 | length 659.3
  Top Layer w10: U2.11 1496.29,1383.71 1520,1360 1520,1260 1530,1250 C12.1 ; IC1.17 1555,1145 1590,1180 1590,1240 C12.1 ; R10.1 C12.1
DIV: U4.2 U4.6 VR1.2 | length 506.4
  Top Layer w10: U4.2 2095,1633.87 2106.72,1645.58 2136.72,1645.58 2142.77,1651.64 2142.77,1739.98 U4.6
  Bottom Layer w10: VR1.2@1920,1748.87 2020,1648.87 v2(2140,1648.87)
DO_1: U2.13 U4.1 | length 692.1
  Top Layer w10: U2.13 1428.03,1438.75 1998.75,1438.75 2045,1485 U4.1
DO_2: U2.14 U4.7 | length 821
  Top Layer w10: U2.14 1870.48,1460.48 2095,1685 U4.7
GND: C1.1 C2.2 C3.2 C4.2 C5.2 C6.1 C7.1 C8.2 C9.1 C10.2 C11.2 C12.2 C13.2 D1.1 IC1.1 J1.A1-B12 J1.B1-A12 LED1.2 LED2.2 P1.2 R2.2 R3.2 R5.1 R7.2 R12.1 R13.2 U1.1 U2.7 U3.2 U3.25 U4.4 VR1.3 | length 1132
  Top Layer w10: U3.25 929.53,1698 U3.2
  Top Layer w20: v2(1330,640) 1403.98,640 IC1.1 ; v2(1940,970) 1940,1017.22 C9.1 ; C9.1@1940,1017.64 C9.1@1940.42,1017.22
  Bottom Layer w20: v2(1330,640) 1910,640 1940,670 v2@1940,950
  other v1: 110,42.37 210,42.37 310,42.37 410,42.37 510,42.37 610,42.37 710,42.37 810,42.37 910,42.37 1010,42.37 1110,42.37 1210,42.37 1310,42.37 1410,42.37 1510,42.37 1610,42.37 1710,42.37 1810,42.37 1910,42.37 2010,42.37 2110,42.37 2210,42.37 2310,42.37 2410,42.37 2510,42.37 2610,42.37 2710,42.37 2810,42.37 2910,42.37 3010,42.37 3110,42.37 3210,42.37 410,142.37 510,142.37 1910,142.37 2010,142.37 2110,142.37 2210,142.37 2310,142.37 2610,142.37 2710,142.37 2810,142.37 2910,142.37 3010,142.37 510,242.37 710,242.37 810,242.37 1010,242.37 1210,242.37 1310,242.37 1410,242.37 1510,242.37 1610,242.37 1710,242.37 1810,242.37 2010,242.37 2110,242.37 2610,242.37 2710,242.37 2810,242.37 2910,242.37 3010,242.37 110,342.37 210,342.37 310,342.37 510,342.37 710,342.37 810,342.37 910,342.37 1010,342.37 1210,342.37 1310,342.37 1410,342.37 1510,342.37 1610,342.37 1710,342.37 1810,342.37 1910,342.37 2110,342.37 2210,342.37 2310,342.37 2910,342.37 3010,342.37 3110,342.37 3210,342.37 3310,342.37 110,442.37 310,442.37 510,442.37 710,442.37 810,442.37 910,442.37 1010,442.37 1210,442.37 1310,442.37 1410,442.37 1510,442.37 1610,442.37 1710,442.37 1810,442.37 1910,442.37 2010,442.37 2110,442.37 2210,442.37 2310,442.37 2410,442.37 2510,442.37 2610,442.37 2710,442.37 2810,442.37 2910,442.37 3010,442.37 3110,442.37 3210,442.37 3310,442.37 110,542.37 510,542.37 1010,542.37 1910,542.37 2010,542.37 2110,542.37 2210,542.37 2310,542.37 2410,542.37 2510,542.37 2610,542.37 2710,542.37 2810,542.37 2910,542.37 3010,542.37 3110,542.37 3210,542.37 3310,542.37 110,642.37 1010,642.37 2010,642.37 2110,642.37 2210,642.37 2310,642.37 2410,642.37 2510,642.37 2610,642.37 2710,642.37 2810,642.37 2910,642.37 3010,642.37 3110,642.37 3210,642.37 3310,642.37 110,742.37 310,742.37 1810,742.37 2010,742.37 2110,742.37 2210,742.37 2310,742.37 2410,742.37 2510,742.37 2610,742.37 2710,742.37 2810,742.37 2910,742.37 3010,742.37 3110,742.37 3210,742.37 3310,742.37 110,842.37 310,842.37 910,842.37 1010,842.37 1110,842.37 1210,842.37 1310,842.37 1410,842.37 1610,842.37 1710,842.37 1810,842.37 2010,842.37 2110,842.37 2210,842.37 2310,842.37 2410,842.37 3010,842.37 3110,842.37 3210,842.37 3310,842.37 110,942.37 310,942.37 410,942.37 1710,942.37 1810,942.37 2010,942.37 2110,942.37 2210,942.37 2310,942.37 2410,942.37 3110,942.37 3210,942.37 3310,942.37 110,1042.37 310,1042.37 510,1042.37 710,1042.37 810,1042.37 2110,1042.37 110,1142.37 310,1142.37 410,1142.37 110,1242.37 210,1242.37 1010,1242.37 2110,1242.37 2210,1242.37 2310,1242.37 2410,1242.37 3110,1242.37 3310,1242.37 295.28,1279.53 110,1342.37 910,1342.37 1110,1342.37 1710,1342.37 1810,1342.37 1910,1342.37 2110,1342.37 2210,1342.37 2310,1342.37 2410,1342.37 3010,1342.37 3110,1342.37 3210,1342.37 3310,1342.37 2110,1442.37 2210,1442.37 2310,1442.37 2410,1442.37 2510,1442.37 2610,1442.37 2710,1442.37 2810,1442.37 2910,1442.37 3010,1442.37 3110,1442.37 3210,1442.37 3310,1442.37 110,1542.37 1010,1542.37 1310,1542.37 1510,1542.37 1610,1542.37 1710,1542.37 1810,1542.37 1910,1542.37 2310,1542.37 2410,1542.37 2510,1542.37 2610,1542.37 2710,1542.37 2810,1542.37 2910,1542.37 3010,1542.37 3110,1542.37 3210,1542.37 3310,1542.37 110,1642.37 1310,1642.37 1610,1642.37 1710,1642.37 2310,1642.37 2410,1642.37 2510,1642.37 2610,1642.37 2710,1642.37 2810,1642.37 2910,1642.37 3010,1642.37 3110,1642.37 3210,1642.37 3310,1642.37 640,1740 110,1742.37 1010,1742.37 1210,1742.37 1310,1742.37 1410,1742.37 1610,1742.37 1710,1742.37 2010,1742.37 2410,1742.37 2510,1742.37 2610,1742.37 2710,1742.37 2810,1742.37 2910,1742.37 3010,1742.37 3110,1742.37 3210,1742.37 3310,1742.37 1910,1842.37 2010,1842.37 2110,1842.37 2310,1842.37 2910,1842.37 3010,1842.37 3110,1842.37 3210,1842.37 3310,1842.37 1870.08,1909.45 510,1942.37 610,1942.37 910,1942.37 1110,1942.37 1210,1942.37 1310,1942.37 1410,1942.37 1510,1942.37 1610,1942.37 1710,1942.37 2210,1942.37 2310,1942.37 2610,1942.37 2710,1942.37 2810,1942.37 3010,1942.37 910,2042.37 1110,2042.37 1210,2042.37 1310,2042.37 1410,2042.37 1510,2042.37 1610,2042.37 1710,2042.37 1810,2042.37 1910,2042.37 2010,2042.37 2110,2042.37 2310,2042.37 3010,2042.37
GRID1: DS1.12 IC1.15 | length 1536.7
  Top Layer w10: DS1.12 380,1050 470,960 1649.14,960 1655,965.86 IC1.15
GRID2: DS1.9 IC1.14 | length 1197.4
  Top Layer w10: v2(1700,1110) 1702.5,1107.5 1702.5,1021.48 IC1.14
  Bottom Layer w10: DS1.9 680,1170 752.73,1097.27 1676.44,1097.27 1689.18,1110 v2(1700,1110)
GRID3: DS1.8 IC1.13 | length 1246.3
  Top Layer w10: IC1.13 1755,1084.18 1773.17,1102.35 1802.35,1102.35 v2(1810,1110)
  Bottom Layer w10: DS1.8 783.11,1215.75 783.11,1186.89 805.37,1164.63 1795.37,1164.63 1810,1150 v2(1810,1110)
NetC4_1: C4.1 C6.2 U3.6 | length 363.1
  Top Layer w10: C6.2 843.2,1959.79 852.99,1950 860,1942.99 860,1900 840,1880 840,1790 850.79,1779.21 U3.6
NetC5_1: C5.1 U2.8 | length 185.3
  Top Layer w10: C5.1 1192.25,1438.46 U2.8
NetLED1_1: LED1.1 R4.2 | length 151.9
  Top Layer w20: R4.2 LED1.1
NetLED2_1: LED2.1 R9.2 | length 151.9
  Top Layer w20: R9.2 LED2.1
NetQ1_1: Q1.1 R5.2 U4.5 | length 884.5
  Top Layer w10: U4.5 2195,1875 2370,2050 2664.36,2050 2670.22,2044.14 2670.22,2018.65 Q1.1 2628.87,2008.87 2599.37,1979.37 R5.2@2530,1979.37
NetQ2_1: Q2.1 R12.2 U4.3 | length 846
  Top Layer w10: U4.3 2145,1573.87 2341.13,1770 2650,1770 2678.72,1798.72 2678.72,1837.59 Q2.1 2540.62,1838.87 R12.2@2540.12,1839.37
NetR6_1: R6.1 R7.1 SW1.1 SW1.2 | length 607.9
  Top Layer w10: R7.1 711.89,387.99 R6.1 899.41,387.99 941.42,430 ; SW1.1 941.42,430 ; SW1.2 941.42,430
NetR11_1: R11.1 R13.1 SW2.1 SW2.2 | length 619.6
  Top Layer w10: R13.1 171.89,397.99 R11.1 399.41,397.99 421.42,420 ; SW2.1 421.42,420 ; SW2.2 421.42,420
RST: P1.4 R1.2 U2.4 | length 504
  Top Layer w10: U2.4 1199.69,1541.11 1241.11,1541.11 1250.12,1550.12 R1.2 v2(1320,1690)
  Bottom Layer w10: v2(1320,1690) 1421.13,1690 1450,1718.87 P1.4 P1.4@1450,1811.49
RX: U2.3 U3.21 | length 313.9
  Top Layer w10: U3.21 1018.2,1639.02 1039.18,1660 v2(1050,1660) ; v2(1050,1580) 1090,1579.97 1107.13,1562.84 U2.3
  Bottom Layer w10: v2(1050,1580) v2(1050,1660)
SEG1: DS1.11 IC1.2 | length 1333.2
  Top Layer w10: v2(1330,920) 1330,870 1455,745 IC1.2
  Bottom Layer w10: DS1.11 480,1170 730,920 v2(1330,920)
SEG2: DS1.7 IC1.3 | length 1147.2
  Top Layer w10: v2(880,1040) DS1.7 ; v2(1410,920) 1460,920 1505,875 IC1.3
  Bottom Layer w10: v2(880,1040) 1360,1040 1410,990 v2(1410,920)
SEG3: DS1.4 IC1.4 | length 1134.6
  Top Layer w10: v2(1550,820) 1552.5,817.5 1552.5,643.52 IC1.4
  Bottom Layer w10: DS1.4 687.25,826.12 687.25,857.25 700,870 1540,870 1550,860 v2(1550,820)
SEG4: DS1.2 IC1.5 | length 1282.3
  Top Layer w10: v2(1600,740) 1602.5,737.5 1602.5,643.52 IC1.5
  Bottom Layer w10: DS1.2 480,770 510,740 v2(1600,740)
SEG5: DS1.1 IC1.6 | length 1486
  Top Layer w10: DS1.1 380,750 440,690 1150,690 1270,570 1649.14,570 1655,575.86 IC1.6
SEG6: DS1.10 IC1.7 | length 1553.5
  Top Layer w10: v2(1530,920) 1590,920 1705,805 IC1.7
  Bottom Layer w10: DS1.10 584.92,1213.95 584.92,1165.08 674,1076 1484,1076 1530,1030 v2(1530,920)
SEG7: DS1.5 IC1.8 | length 1144.1
  Top Layer w10: v2(1750,780) 1752.5,777.5 1752.5,643.52 IC1.8
  Bottom Layer w10: DS1.5 783.11,815.75 783.11,786.89 790,780 v2(1750,780)
SEG8: DS1.3 IC1.9 | length 1572.7
  Top Layer w10: DS1.3 580,760 600,740 1200,740 1210,730 v2(1210,690) ; v2(1210,540) 1780,540 1805,565 IC1.9
  Bottom Layer w10: v2(1210,540) v2(1210,690)
SWIM: P1.3 U2.18 | length 297
  Top Layer w10: P1.3 1360,1790.94 1360,1578.87 1376.02,1562.84 U2.18
TX: U2.2 U3.20 | length 230.7
  Top Layer w10: U3.20 1079.99,1618.86 1101.14,1618.86 1130,1590 1194.26,1590 U2.2
pads on no net: IC1.10 IC1.11 IC1.12 IC1.19 IC1.20 J1. J1.1 J1.2 J1.3 J1.4 J1.A8 J1.B8 U2.1 U2.10 U2.15 U2.16 U2.17 U2.19 U2.20 U3.1 U3.9 U3.10 U3.11 U3.12 U3.13 U3.14 U3.15 U3.16 U3.17 U3.18 U3.19 U3.22 U3.23 U3.24

## Polygon pours and split planes (outlines as drawn)
GND on Top Layer "GND_L01_P000" (solid, pour order 0): 157.73,-0.5 3228.35,-0.5 ccw(c3228.35,157.48) 3386.33,157.48 3386.97,2047.24 ccw(c3228.26,2047.15) 3228.35,2205.87 158.63,2205.87 ccw(c158.62,2047.25) 0,2047.24 0,157.48 ccw(c157.86,157.35)
GND on Bottom Layer "GND_L02_P001" (solid, pour order 1): 157.98,-0.5 3228.35,-0.5 ccw(c3228.35,157.48) 3386.33,157.48 3386.33,2047.24 ccw(c3228.35,2047.25) 3228.35,2205.23 158.63,2205.87 ccw(c158.63,2047.25) 0,2047.24 0,157.48 ccw(c157.98,157.48)

## Keep-outs
Keep-Out Layer:
  circle w61.02: c2244.19,1102.7 r92.52
  circle w61.02: c3189.11,1102.15 r92.52
  circle w61.02: c3189.89,196.57 r92.52
  circle w61.02: c197.6,2009.14 r92.52
  circle w61.02: c196.16,197.26 r92.52
  circle w61.02: c3189.5,2008.63 r92.52
  lines w20: 0,153 -1,2045 cw(c160,2045) 160,2206 2564,2207 3145,2206 ; 0,160 ccw(c160,160) 160,0 230,0 ; 220,0 290,0 3171,0 ; 3125,2206 3224.68,2206 cw(c3224.68,2042.55) 3388.13,2042.55 3387,380 ; 3152,0 3227,0 ccw(c3227,160) 3387,160 3387,397

## Silkscreen, mask and mechanical layers (free items; w line width, h text height)
Top Overlay:
  text "3.3V" at 1130,1880.33 h30
  text "GND" at 1220,1880.33 h30
  text "SWIM" at 1320,1880.33 h30
  text "RST" at 1430,1880.33 h30